# Altium PCB cs301_newrv2.PcbDoc
Units mil, origin at the board's own origin, x right, y up, seen from the top; angles counter-clockwise.
Board outline 10825 x 6635 mil, 2 copper layers (Top Layer, Bottom Layer); 118 components, 73 nets, 393 pads, 0 vias.
Unrouted connection lines stored in the file: 201.
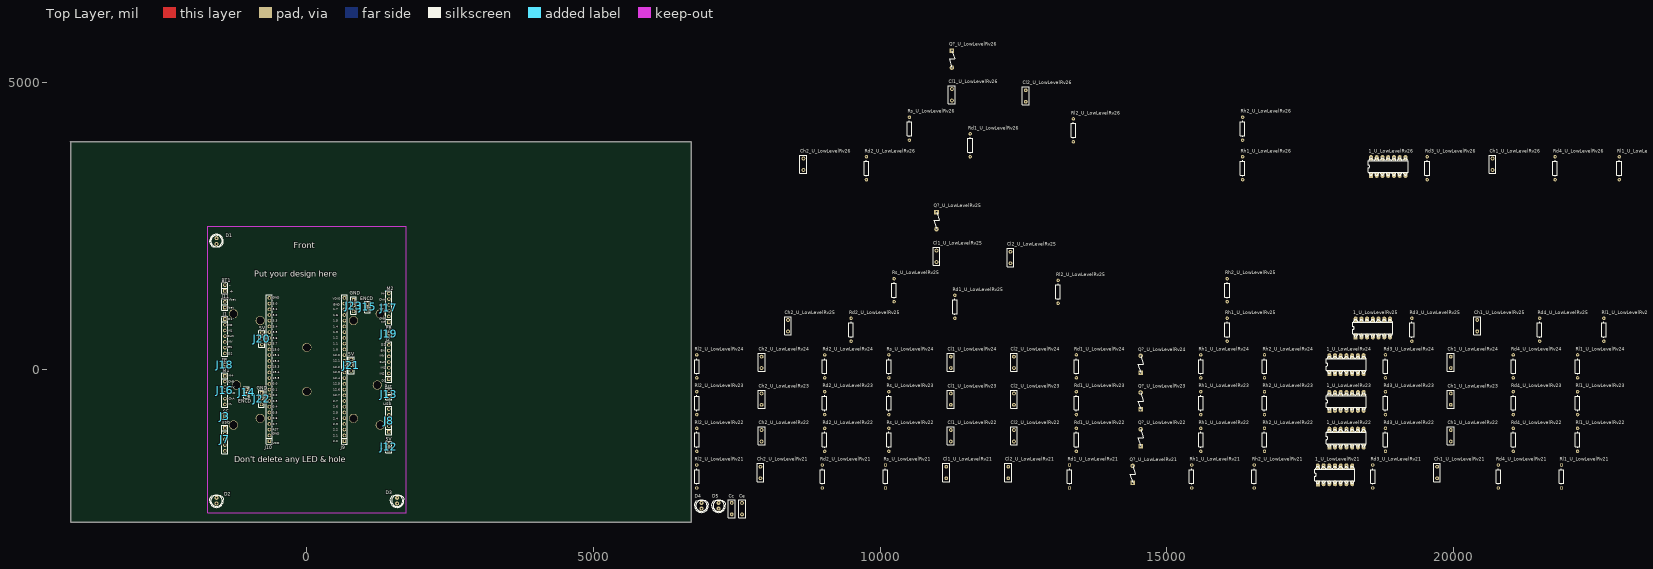
[diagram p0: Top Layer view]
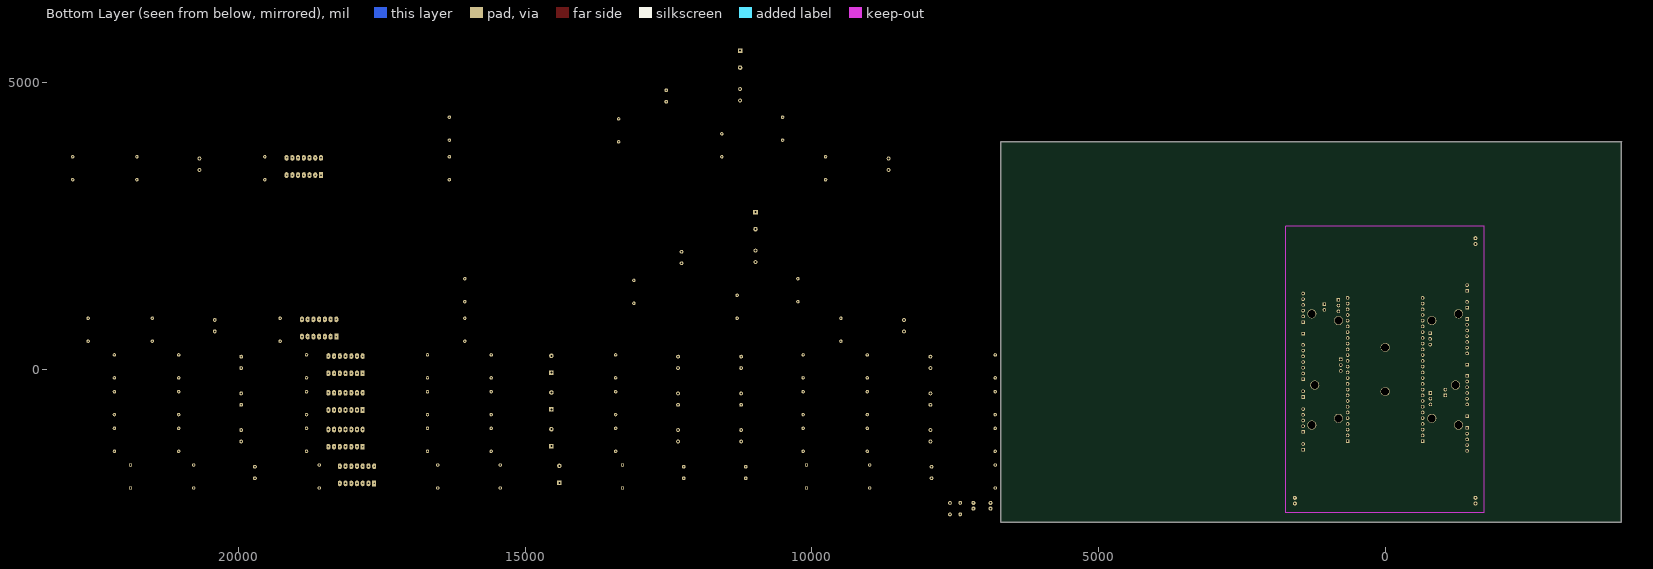
[diagram p1: Bottom Layer view, seen from below]

## Layer stack, top to bottom
Top Solder: solder mask 0.4, Solder Resist, Dk 3.5
Top Layer: signal copper 1.4
Dielectric1: dielectric 12.6, FR-4, Dk 4.8
Bottom Layer: signal copper 1.4
Bottom Solder: solder mask 0.4, Solder Resist, Dk 3.5

## Board outline
-4118.11,-2656.69 -4113.11,-2661.69 6701.89,-2661.69 6701.89,3973.31 -4123.11,3973.31 -4118.11,3968.31 -4118.11,-2656.69

## Design rules (kind name [scope] priority, off if disabled: settings)
Clearance [All] p1: gap=10 ignorepadtopadclearanceinfootprint=FALSE except(0: Arc-Hole Track-Hole SMDPad-Hole THPad-Hole Via-Hole Fill-Hole Poly-Hole Region-Hole Text-Hole)
PolygonConnect [All] p1: connectstyle=Relief reliefconductorwidth=20 reliefentries=4 polygonreliefangle="90 Angle" airgapwidth=10
RoomDefinition U_LowLevelRv26 [InComponentClass('U_LowLevelRv26')] p1: confinementstyle=ConfineIn formatcopy=TRUE lockcomponents=FALSE outline 7020,3270 23910,3270 23910,5930 7020,5930
RoomDefinition U_LowLevelRv25 [InComponentClass('U_LowLevelRv25')] p2: confinementstyle=ConfineIn formatcopy=TRUE lockcomponents=FALSE outline 6751.89,453.31 23641.89,453.31 23641.89,3113.31 6751.89,3113.31
RoomDefinition U_LowLevelRv24 [InComponentClass('U_LowLevelRv24')] p3: confinementstyle=ConfineIn formatcopy=TRUE lockcomponents=FALSE outline 6751.89,-186.69 23181.89,-186.69 23181.89,403.31 6751.89,403.31
RoomDefinition U_LowLevelRv23 [InComponentClass('U_LowLevelRv23')] p4: confinementstyle=ConfineIn formatcopy=TRUE lockcomponents=FALSE outline 6751.89,-826.69 23181.89,-826.69 23181.89,-236.69 6751.89,-236.69
RoomDefinition U_LowLevelRv22 [InComponentClass('U_LowLevelRv22')] p5: confinementstyle=ConfineIn formatcopy=TRUE lockcomponents=FALSE outline 6751.89,-1466.69 23181.89,-1466.69 23181.89,-876.69 6751.89,-876.69
RoomDefinition U_LowLevelRv21 [InComponentClass('U_LowLevelRv21')] p6: confinementstyle=ConfineIn formatcopy=TRUE lockcomponents=FALSE outline 6751.89,-2106.69 22881.89,-2106.69 22881.89,-1516.69 6751.89,-1516.69
RoomDefinition cs301_YourGroupNumber3 [InComponentClass('cs301_YourGroupNumber3')] p7: confinementstyle=ConfineIn formatcopy=TRUE lockcomponents=FALSE outline 6751.89,-2596.69 7661.89,-2596.69 7661.89,-2156.69 6751.89,-2156.69
RoutingVias [All] p1: holewidth=28 width=50 viastyle="Through Hole" minholewidth=28 minwidth=50 maxholewidth=28 maxwidth=50
SilkToSolderMaskClearance SilkscreenOverComponentPads [IsPad] p1: minsilkscreentomaskgap=10 clearancetoexposedcopper=TRUE
SolderMaskExpansion [All] p1: expansion=4
Width [All] p1: maxlimit=30 minlimit=10 preferedwidth=10 minimp=50.000000 maximp=50.000000 favimp=50.000000
29 further rules are at their usual default settings.

## Classes and differential pairs
component class U_LowLevelRv21: 1_U_LowLevelRv21 Ch1_U_LowLevelRv21 Ch2_U_LowLevelRv21 Cl1_U_LowLevelRv21 Cl2_U_LowLevelRv21 Q?_U_LowLevelRv21 Rd1_U_LowLevelRv21 Rd2_U_LowLevelRv21 Rd3_U_LowLevelRv21 Rd4_U_LowLevelRv21 Rh1_U_LowLevelRv21 Rh2_U_LowLevelRv21 Rl1_U_LowLevelRv21 Rl2_U_LowLevelRv21 Rs_U_LowLevelRv21
component class U_LowLevelRv22: 1_U_LowLevelRv22 Ch1_U_LowLevelRv22 Ch2_U_LowLevelRv22 Cl1_U_LowLevelRv22 Cl2_U_LowLevelRv22 Q?_U_LowLevelRv22 Rd1_U_LowLevelRv22 Rd2_U_LowLevelRv22 Rd3_U_LowLevelRv22 Rd4_U_LowLevelRv22 Rh1_U_LowLevelRv22 Rh2_U_LowLevelRv22 Rl1_U_LowLevelRv22 Rl2_U_LowLevelRv22 Rs_U_LowLevelRv22
component class U_LowLevelRv23: 1_U_LowLevelRv23 Ch1_U_LowLevelRv23 Ch2_U_LowLevelRv23 Cl1_U_LowLevelRv23 Cl2_U_LowLevelRv23 Q?_U_LowLevelRv23 Rd1_U_LowLevelRv23 Rd2_U_LowLevelRv23 Rd3_U_LowLevelRv23 Rd4_U_LowLevelRv23 Rh1_U_LowLevelRv23 Rh2_U_LowLevelRv23 Rl1_U_LowLevelRv23 Rl2_U_LowLevelRv23 Rs_U_LowLevelRv23
component class U_LowLevelRv24: 1_U_LowLevelRv24 Ch1_U_LowLevelRv24 Ch2_U_LowLevelRv24 Cl1_U_LowLevelRv24 Cl2_U_LowLevelRv24 Q?_U_LowLevelRv24 Rd1_U_LowLevelRv24 Rd2_U_LowLevelRv24 Rd3_U_LowLevelRv24 Rd4_U_LowLevelRv24 Rh1_U_LowLevelRv24 Rh2_U_LowLevelRv24 Rl1_U_LowLevelRv24 Rl2_U_LowLevelRv24 Rs_U_LowLevelRv24
component class U_LowLevelRv25: 1_U_LowLevelRv25 Ch1_U_LowLevelRv25 Ch2_U_LowLevelRv25 Cl1_U_LowLevelRv25 Cl2_U_LowLevelRv25 Q?_U_LowLevelRv25 Rd1_U_LowLevelRv25 Rd2_U_LowLevelRv25 Rd3_U_LowLevelRv25 Rd4_U_LowLevelRv25 Rh1_U_LowLevelRv25 Rh2_U_LowLevelRv25 Rl1_U_LowLevelRv25 Rl2_U_LowLevelRv25 Rs_U_LowLevelRv25
component class U_LowLevelRv26: 1_U_LowLevelRv26 Ch1_U_LowLevelRv26 Ch2_U_LowLevelRv26 Cl1_U_LowLevelRv26 Cl2_U_LowLevelRv26 Q?_U_LowLevelRv26 Rd1_U_LowLevelRv26 Rd2_U_LowLevelRv26 Rd3_U_LowLevelRv26 Rd4_U_LowLevelRv26 Rh1_U_LowLevelRv26 Rh2_U_LowLevelRv26 Rl1_U_LowLevelRv26 Rl2_U_LowLevelRv26 Rs_U_LowLevelRv26
net class ADC[5..0]: ADC0 ADC1 ADC2 ADC3 ADC4 ADC5
channel class LowLevelRv2: U_LowLevelRv21 U_LowLevelRv22 U_LowLevelRv23 U_LowLevelRv24 U_LowLevelRv25 U_LowLevelRv26

## Components (designator, comment, footprint, x,y, rotation, side; value= is the part's Value field where it differs from the comment)
1_U_LowLevelRv21 "LM324N" ECE-DIP14TH 17631.89,-1986.69 r90 top (schematic designator 1)
1_U_LowLevelRv22 "LM324N" ECE-DIP14TH 17831.89,-1346.69 r90 top (schematic designator 1)
1_U_LowLevelRv23 "LM324N" ECE-DIP14TH 17831.89,-706.69 r90 top (schematic designator 1)
1_U_LowLevelRv24 "LM324N" ECE-DIP14TH 17831.89,-66.69 r90 top (schematic designator 1)
1_U_LowLevelRv25 "LM324N" ECE-DIP14TH 18291.89,573.31 r90 top (schematic designator 1)
1_U_LowLevelRv26 "LM324N" ECE-DIP14TH 18560,3390 r90 top (schematic designator 1)
BT1 "Battery" SIP2 -1430,1370 r90 top locked
Cc "*" "FILM CAP-0.2" 7411.89,-2426.69 r90 top
Ce "*" "FILM CAP-0.2" 7591.89,-2426.69 r90 top
Ch1_U_LowLevelRv21 "" "FILM CAP-0.2" 19711.89,-1796.69 r90 top (schematic designator Ch1)
Ch1_U_LowLevelRv22 "" "FILM CAP-0.2" 19951.89,-1156.69 r90 top (schematic designator Ch1)
Ch1_U_LowLevelRv23 "" "FILM CAP-0.2" 19951.89,-516.69 r90 top (schematic designator Ch1)
Ch1_U_LowLevelRv24 "" "FILM CAP-0.2" 19951.89,123.31 r90 top (schematic designator Ch1)
Ch1_U_LowLevelRv25 "" "FILM CAP-0.2" 20411.89,763.31 r90 top (schematic designator Ch1)
Ch1_U_LowLevelRv26 "" "FILM CAP-0.2" 20680,3580 r90 top (schematic designator Ch1)
Ch2_U_LowLevelRv21 "" "FILM CAP-0.2" 7911.89,-1796.69 r90 top (schematic designator Ch2)
Ch2_U_LowLevelRv22 "" "FILM CAP-0.2" 7931.89,-1156.69 r90 top (schematic designator Ch2)
Ch2_U_LowLevelRv23 "" "FILM CAP-0.2" 7931.89,-516.69 r90 top (schematic designator Ch2)
Ch2_U_LowLevelRv24 "" "FILM CAP-0.2" 7931.89,123.31 r90 top (schematic designator Ch2)
Ch2_U_LowLevelRv25 "" "FILM CAP-0.2" 8391.89,763.31 r90 top (schematic designator Ch2)
Ch2_U_LowLevelRv26 "" "FILM CAP-0.2" 8660,3580 r90 top (schematic designator Ch2)
Cl1_U_LowLevelRv21 "" "FILM CAP-0.2" 11151.89,-1796.69 r90 top (schematic designator Cl1)
Cl1_U_LowLevelRv22 "" "FILM CAP-0.2" 11231.89,-1156.69 r90 top (schematic designator Cl1)
Cl1_U_LowLevelRv23 "" "FILM CAP-0.2" 11231.89,-516.69 r90 top (schematic designator Cl1)
Cl1_U_LowLevelRv24 "" "FILM CAP-0.2" 11231.89,123.31 r90 top (schematic designator Cl1)
Cl1_U_LowLevelRv25 "" "FILM CAP-0.2" 10981.89,1973.31 r270 top (schematic designator Cl1)
Cl1_U_LowLevelRv26 "" "FILM CAP-0.2" 11250,4790 r270 top (schematic designator Cl1)
Cl2_U_LowLevelRv21 "" "FILM CAP-0.2" 12231.89,-1796.69 r90 top (schematic designator Cl2)
Cl2_U_LowLevelRv22 "" "FILM CAP-0.2" 12331.89,-1156.69 r90 top (schematic designator Cl2)
Cl2_U_LowLevelRv23 "" "FILM CAP-0.2" 12331.89,-516.69 r90 top (schematic designator Cl2)
Cl2_U_LowLevelRv24 "" "FILM CAP-0.2" 12331.89,123.31 r90 top (schematic designator Cl2)
Cl2_U_LowLevelRv25 "" "FILM CAP-0.2" 12271.89,1953.31 r90 top (schematic designator Cl2)
Cl2_U_LowLevelRv26 "" "FILM CAP-0.2" 12540,4770 r90 top (schematic designator Cl2)
D1 "LED" LED0.1/5MM#1 -1574.8,2189.76 r180 top locked
D2 "LED" LED0.1/5MM#2 -1574.8,-2239.37 r0 top locked
D3 "LED" LED0.1/5MM#1 1574.8,-2239.37 r0 top locked
D4 "LED" LED0.1/5MM#1 6881.89,-2326.69 r0 top
D5 "LED" LED0.1/5MM#1 7181.89,-2326.69 r0 top
J1 "CON7" SIP7 -1430,880 r270 top locked
J2 "CON7" SIP7 1430,-170 r90 top locked
J3 "SF" SIP1/0.6 -1430,-815 r270 top locked
J7 "usb" SIP5 -1430,-1020 r270 top locked
J8 "usb" SIP5 1430,-1090 r90 top locked
J9 "26PIN" SIP26 655,-1250 r90 top locked
J10 "26PIN" SIP26 -655,-1250 r90 top locked
J11 "Battery" sip2 -1430,1080 r90 top locked
J12 "5V" sip2 1430,-1400 r90 top locked
J13 "Rst" sip2 1430,-480 r90 top locked
J14 "ENCD" sip2 -1050,-450 r90 top locked
J15 "ENCD" sip2 1060,1140 r270 top locked
J16 "M1" sip6 -1430,-110 r270 top locked
J17 "M2" sip6 1430,825 r90 top locked
J18 "FB" SIP1/0.6 -1430,85 r0 top locked
J19 "FB" SIP1/0.6 1430,625 r0 top locked
J20 "5V" sip3 -785,635 r270 top locked
J21 "5V" sip3 775,175 r270 top locked
J22 "GND" sip3 -790,-410 r270 top locked
J23 "GND" sip3 815,1215 r270 top locked
Q?_U_LowLevelRv21 "VEMT3700" VEMT3700 14551.89,-2076.69 r90 top (schematic designator Q?)
Q?_U_LowLevelRv22 "VEMT3700" VEMT3700 14691.89,-1436.69 r90 top (schematic designator Q?)
Q?_U_LowLevelRv23 "VEMT3700" VEMT3700 14691.89,-796.69 r90 top (schematic designator Q?)
Q?_U_LowLevelRv24 "VEMT3700" VEMT3700 14691.89,-156.69 r90 top (schematic designator Q?)
Q?_U_LowLevelRv25 "VEMT3700" VEMT3700 10831.89,2843.31 r270 top (schematic designator Q?)
Q?_U_LowLevelRv26 "VEMT3700" VEMT3700 11100,5660 r270 top (schematic designator Q?)
Rd1_U_LowLevelRv21 "" AXIAL-0.4 13301.89,-1866.69 r90 top (schematic designator Rd1)
Rd1_U_LowLevelRv22 "" AXIAL-0.4 13421.89,-1226.69 r90 top (schematic designator Rd1)
Rd1_U_LowLevelRv23 "" AXIAL-0.4 13421.89,-586.69 r90 top (schematic designator Rd1)
Rd1_U_LowLevelRv24 "" AXIAL-0.4 13421.89,53.31 r90 top (schematic designator Rd1)
Rd1_U_LowLevelRv25 "" AXIAL-0.4 11301.89,1093.31 r270 top (schematic designator Rd1)
Rd1_U_LowLevelRv26 "" AXIAL-0.4 11570,3910 r270 top (schematic designator Rd1)
Rd2_U_LowLevelRv21 "" AXIAL-0.4 8991.89,-1866.69 r90 top (schematic designator Rd2)
Rd2_U_LowLevelRv22 "" AXIAL-0.4 9031.89,-1226.69 r90 top (schematic designator Rd2)
Rd2_U_LowLevelRv23 "" AXIAL-0.4 9031.89,-586.69 r90 top (schematic designator Rd2)
Rd2_U_LowLevelRv24 "" AXIAL-0.4 9031.89,53.31 r90 top (schematic designator Rd2)
Rd2_U_LowLevelRv25 "" AXIAL-0.4 9491.89,693.31 r90 top (schematic designator Rd2)
Rd2_U_LowLevelRv26 "" AXIAL-0.4 9760,3510 r90 top (schematic designator Rd2)
Rd3_U_LowLevelRv21 "" AXIAL-0.4 18591.89,-1866.69 r90 top (schematic designator Rd3)
Rd3_U_LowLevelRv22 "" AXIAL-0.4 18811.89,-1226.69 r90 top (schematic designator Rd3)
Rd3_U_LowLevelRv23 "" AXIAL-0.4 18811.89,-586.69 r90 top (schematic designator Rd3)
Rd3_U_LowLevelRv24 "" AXIAL-0.4 18811.89,53.31 r90 top (schematic designator Rd3)
Rd3_U_LowLevelRv25 "" AXIAL-0.4 19271.89,693.31 r90 top (schematic designator Rd3)
Rd3_U_LowLevelRv26 "" AXIAL-0.4 19540,3510 r90 top (schematic designator Rd3)
Rd4_U_LowLevelRv21 "" AXIAL-0.4 20781.89,-1866.69 r90 top (schematic designator Rd4)
Rd4_U_LowLevelRv22 "" AXIAL-0.4 21041.89,-1226.69 r90 top (schematic designator Rd4)
Rd4_U_LowLevelRv23 "" AXIAL-0.4 21041.89,-586.69 r90 top (schematic designator Rd4)
Rd4_U_LowLevelRv24 "" AXIAL-0.4 21041.89,53.31 r90 top (schematic designator Rd4)
Rd4_U_LowLevelRv25 "" AXIAL-0.4 21501.89,693.31 r90 top (schematic designator Rd4)
Rd4_U_LowLevelRv26 "" AXIAL-0.4 21770,3510 r90 top (schematic designator Rd4)
Rh1_U_LowLevelRv21 "" AXIAL-0.4 15431.89,-1866.69 r90 top (schematic designator Rh1)
Rh1_U_LowLevelRv22 "" AXIAL-0.4 15591.89,-1226.69 r90 top (schematic designator Rh1)
Rh1_U_LowLevelRv23 "" AXIAL-0.4 15591.89,-586.69 r90 top (schematic designator Rh1)
Rh1_U_LowLevelRv24 "" AXIAL-0.4 15591.89,53.31 r90 top (schematic designator Rh1)
Rh1_U_LowLevelRv25 "" AXIAL-0.4 16051.89,693.31 r90 top (schematic designator Rh1)
Rh1_U_LowLevelRv26 "" AXIAL-0.4 16320,3510 r90 top (schematic designator Rh1)
Rh2_U_LowLevelRv21 "" AXIAL-0.4 16521.89,-1866.69 r90 top (schematic designator Rh2)
Rh2_U_LowLevelRv22 "" AXIAL-0.4 16701.89,-1226.69 r90 top (schematic designator Rh2)
Rh2_U_LowLevelRv23 "" AXIAL-0.4 16701.89,-586.69 r90 top (schematic designator Rh2)
Rh2_U_LowLevelRv24 "" AXIAL-0.4 16701.89,53.31 r90 top (schematic designator Rh2)
Rh2_U_LowLevelRv25 "" AXIAL-0.4 16051.89,1383.31 r90 top (schematic designator Rh2)
Rh2_U_LowLevelRv26 "" AXIAL-0.4 16320,4200 r90 top (schematic designator Rh2)
Rl1_U_LowLevelRv21 "" AXIAL-0.4 21881.89,-1866.69 r90 top (schematic designator Rl1)
Rl1_U_LowLevelRv22 "" AXIAL-0.4 22161.89,-1226.69 r90 top (schematic designator Rl1)
Rl1_U_LowLevelRv23 "" AXIAL-0.4 22161.89,-586.69 r90 top (schematic designator Rl1)
Rl1_U_LowLevelRv24 "" AXIAL-0.4 22161.89,53.31 r90 top (schematic designator Rl1)
Rl1_U_LowLevelRv25 "" AXIAL-0.4 22621.89,693.31 r90 top (schematic designator Rl1)
Rl1_U_LowLevelRv26 "" AXIAL-0.4 22890,3510 r90 top (schematic designator Rl1)
Rl2_U_LowLevelRv21 "" AXIAL-0.4 6801.89,-1866.69 r90 top (schematic designator Rl2)
Rl2_U_LowLevelRv22 "" AXIAL-0.4 6801.89,-1226.69 r90 top (schematic designator Rl2)
Rl2_U_LowLevelRv23 "" AXIAL-0.4 6801.89,-586.69 r90 top (schematic designator Rl2)
Rl2_U_LowLevelRv24 "" AXIAL-0.4 6801.89,53.31 r90 top (schematic designator Rl2)
Rl2_U_LowLevelRv25 "" AXIAL-0.4 13101.89,1353.31 r270 top (schematic designator Rl2)
Rl2_U_LowLevelRv26 "" AXIAL-0.4 13370,4170 r270 top (schematic designator Rl2)
Rs_U_LowLevelRv21 "" AXIAL-0.4 10091.89,-1866.69 r90 top (schematic designator Rs)
Rs_U_LowLevelRv22 "" AXIAL-0.4 10151.89,-1226.69 r90 top (schematic designator Rs)
Rs_U_LowLevelRv23 "" AXIAL-0.4 10151.89,-586.69 r90 top (schematic designator Rs)
Rs_U_LowLevelRv24 "" AXIAL-0.4 10151.89,53.31 r90 top (schematic designator Rs)
Rs_U_LowLevelRv25 "" AXIAL-0.4 10241.89,1383.31 r90 top (schematic designator Rs)
Rs_U_LowLevelRv26 "" AXIAL-0.4 10510,4200 r90 top (schematic designator Rs)

## Footprints (in the part's own frame and the unit in brackets; to place one, negate y for a bottom-side part, rotate by r counter-clockwise, add the part's x,y. Pads: shape width x height; smd on the part's side, far side on the other; paste and mask are expansions set on the pad)
AXIAL-0.4 [mil]
  round 60 hole 27.56: 1(-200,0) 2(200,0)
  silkscreen extent -138,-40 138,40, body extent -120,-40 120,40, height 81
ECE-DIP14TH [mil] "14 pin Dual in line"
  rect 100x70 hole 28: 1(0,0)
  oval 100x70 hole 28: 2(0,-100) 3(0,-200) 4(0,-300) 5(0,-400) 6(0,-500) 7(0,-600) 8(300,-600) 9(300,-500) 10(300,-400) 11(300,-300) 12(300,-200) 13(300,-100) 14(300,0)
  silkscreen extent 0,-646 300,50
"FILM CAP-0.2" [mm]
  round 1.7 hole 0.8: 1(-2.54,0) 2(2.54,0)
  silkscreen extent -4,-1.5 4,1.5, body extent -3.81,-1.27 3.81,1.27, height 7
LED0.1/5MM#1 [mil]
  round 70 hole 30: A(0,0) K(0,-100)
  silkscreen extent -118,-168 118,50
LED0.1/5MM#2 [mil]
  round 70 hole 30: A(0,0) K(0,-98.43)
  silkscreen extent -118,-168 118,50
SIP1/0.6 [mil]
  rect 62x62 hole 35.43: 1(0,0)
  silkscreen extent -50,-50 50,50
SIP2 [mil]
  rect 62x62 hole 35.43: 1(0,0)
  round 62 hole 35.43: 2(100,0)
  silkscreen extent -50,-50 150,50
sip2 [mil]
  rect 62x62 hole 35.43: 1(0,0)
  round 62 hole 35.43: 2(100,0)
  silkscreen extent -50,-50 150,50
sip3 [mil]
  rect 62x62 hole 35.43: 1(0,0)
  round 62 hole 35.43: 2(100,0) 3(200,0)
  silkscreen extent -50,-50 250,50
SIP5 [mil]
  rect 62x62 hole 35.43: 1(0,0)
  round 62 hole 35.43: 2(100,0) 3(200,0) 4(300,0) 5(400,0)
  silkscreen extent -50,-50 450,50
sip6 [mil]
  rect 62x62 hole 35.43: 1(0,0)
  round 62 hole 35.43: 2(100,0) 3(200,0) 4(300,0) 5(400,0) 6(500,0)
  silkscreen extent -50,-50 550,50
SIP7 [mil]
  rect 62x62 hole 35.43: 1(0,0)
  round 62 hole 35.43: 2(100,0) 3(200,0) 4(300,0) 5(400,0) 6(500,0) 7(600,0)
  silkscreen extent -50,-50 650,50
SIP26 [mil]
  rect 62x62 hole 35.43: 1(0,0)
  round 62 hole 35.43: 2(100,0) 3(200,0) 4(300,0) 5(400,0) 6(500,0) 7(600,0) 8(700,0) 9(800,0) 10(900,0) 11(1000,0) 12(1100,0) 13(1200,0) 14(1300,0) 15(1400,0) 16(1500,0) 17(1600,0) 18(1700,0) 19(1800,0) 20(1900,0) 21(2000,0) 22(2100,0) 23(2200,0) 24(2300,0) 25(2400,0) 26(2500,0)
  silkscreen extent -50,-50 2550,50
VEMT3700 [mm]
  rect 2x2 hole 0.9: 1(2.54,3.81)
  round 2 hole 0.9: 2(10.033,3.81)
  silkscreen extent 2.54,2.54 10.03,5.08

## Part data
1_U_LowLevelRv21 1_U_LowLevelRv22 1_U_LowLevelRv23 1_U_LowLevelRv24 1_U_LowLevelRv25 1_U_LowLevelRv26: library part OPA000002, "IC OPAMP LM324 QUAD TH", Manufactuer="Texas instruments", Size/Package=DIP14, Assembly Method="Through hole", Category=OpAmp, Datasheet Link=http://share.engineering.auckland.ac.nz/ece/ts/Student%20Documents/LM324.pdf, Item Type=Item, Manufacturer-PN=LM324N, Path="ece/ts/Lists/Stock Inventory", Status=Active, Supplier1=Digikey, Supplier1-PN=296-1391-5-ND, Supplier2="Active Components", Supplier2-PN=LM324N, UoA Stock#=OPA000002
BT1 J11 J12 J13 J14 J15: library part CON2, "Connector"
Cc Ce Ch1_U_LowLevelRv21 Ch1_U_LowLevelRv22 Ch1_U_LowLevelRv23 Ch1_U_LowLevelRv24 Ch1_U_LowLevelRv25 Ch1_U_LowLevelRv26 Ch2_U_LowLevelRv21 Ch2_U_LowLevelRv22 Ch2_U_LowLevelRv23 Ch2_U_LowLevelRv24 Ch2_U_LowLevelRv25 Ch2_U_LowLevelRv26 Cl1_U_LowLevelRv21 Cl1_U_LowLevelRv22 Cl1_U_LowLevelRv23 Cl1_U_LowLevelRv24 Cl1_U_LowLevelRv25 Cl1_U_LowLevelRv26 Cl2_U_LowLevelRv21 Cl2_U_LowLevelRv22 Cl2_U_LowLevelRv23 Cl2_U_LowLevelRv24 Cl2_U_LowLevelRv25 Cl2_U_LowLevelRv26: library part CAP, "Capacitor Non Polarised Through Hole"
J1 J2: "Connector"
J3 J18 J19: library part CON1, "Connector"
J7 J8: library part CON5, "Connector"
J16 J17: library part CON6, "Connector"
J20 J21 J22 J23: library part CON3, "Connector"
Q?_U_LowLevelRv21 Q?_U_LowLevelRv22 Q?_U_LowLevelRv23 Q?_U_LowLevelRv24 Q?_U_LowLevelRv25 Q?_U_LowLevelRv26: "Silicon NPN Phototransistor"
Rd1_U_LowLevelRv21 Rd1_U_LowLevelRv22 Rd1_U_LowLevelRv23 Rd1_U_LowLevelRv24 Rd1_U_LowLevelRv25 Rd1_U_LowLevelRv26 Rd2_U_LowLevelRv21 Rd2_U_LowLevelRv22 Rd2_U_LowLevelRv23 Rd2_U_LowLevelRv24 Rd2_U_LowLevelRv25 Rd2_U_LowLevelRv26 Rd3_U_LowLevelRv21 Rd3_U_LowLevelRv22 Rd3_U_LowLevelRv23 Rd3_U_LowLevelRv24 Rd3_U_LowLevelRv25 Rd3_U_LowLevelRv26 Rd4_U_LowLevelRv21 Rd4_U_LowLevelRv22 Rd4_U_LowLevelRv23 Rd4_U_LowLevelRv24 Rd4_U_LowLevelRv25 Rd4_U_LowLevelRv26 Rh1_U_LowLevelRv21 Rh1_U_LowLevelRv22 Rh1_U_LowLevelRv23 Rh1_U_LowLevelRv24 Rh1_U_LowLevelRv25 Rh1_U_LowLevelRv26 Rh2_U_LowLevelRv21 Rh2_U_LowLevelRv22 Rh2_U_LowLevelRv23 Rh2_U_LowLevelRv24 Rh2_U_LowLevelRv25 Rh2_U_LowLevelRv26 Rl1_U_LowLevelRv21 Rl1_U_LowLevelRv22 Rl1_U_LowLevelRv23 Rl1_U_LowLevelRv24 Rl1_U_LowLevelRv25 Rl1_U_LowLevelRv26 Rl2_U_LowLevelRv21 Rl2_U_LowLevelRv22 Rl2_U_LowLevelRv23 Rl2_U_LowLevelRv24 Rl2_U_LowLevelRv25 Rl2_U_LowLevelRv26 Rs_U_LowLevelRv21 Rs_U_LowLevelRv22 Rs_U_LowLevelRv23 Rs_U_LowLevelRv24 Rs_U_LowLevelRv25 Rs_U_LowLevelRv26: library part Res, "Through Hole Resistor", ComponentLink1Description=http://www.royalohm.com/pdf/product2017/PrecisionMetalMF.pdf, LatestRevisionDate=17-Jul-2002, LatestRevisionNote="Re-released for DXP Platform.", PackageReference=AXIAL-0.4, Published=8-Jun-2000, Publisher="Altium Limited"

## Free pads (board coordinates)
  round 157.48 hole 137.8 unplated: 0(-1280,-970) 0(-1280,970) 0(-1228,-272) 0(0,-385) 0(0,385) 0(1228,-272) 0(1280,-970) 0(1280,970) 1(-813,-853) 1(-813,853) 1(813,-853) 1(813,853)

## Nets (pads, with @x,y where several pads share a name; then routed paths per layer and width w, separated by ;. In a path a pad name is that pad's centre, name@x,y a point inside that pad or via, vN(x,y) a via of type N, cw(c..) or ccw(c..) an arc to the next point about the centre after c; other vN are vias at no path point)
5V: 1_U_LowLevelRv21.4 1_U_LowLevelRv22.4 1_U_LowLevelRv23.4 1_U_LowLevelRv24.4 1_U_LowLevelRv25.4 1_U_LowLevelRv26.4 Cc.1 Ce.1 J12.1 J20.1 J20.2 J20.3 J21.1 J21.2 J21.3 Q?_U_LowLevelRv21.1 Q?_U_LowLevelRv22.1 Q?_U_LowLevelRv23.1 Q?_U_LowLevelRv24.1 Q?_U_LowLevelRv25.1 Q?_U_LowLevelRv26.1
ADC0: J10.3
ADC1: J10.4
ADC2: J10.5
ADC3: J9.24
ADC4: J9.23
ADC5: J9.22
ADC_wire1: 1_U_LowLevelRv21.8 1_U_LowLevelRv21.9 Ch2_U_LowLevelRv21.1
ADC_wire2: 1_U_LowLevelRv22.8 1_U_LowLevelRv22.9 Ch2_U_LowLevelRv22.1
ADC_wire3: 1_U_LowLevelRv23.8 1_U_LowLevelRv23.9 Ch2_U_LowLevelRv23.1
ADC_wire4: 1_U_LowLevelRv24.8 1_U_LowLevelRv24.9 Ch2_U_LowLevelRv24.1
ADC_wire5: 1_U_LowLevelRv25.8 1_U_LowLevelRv25.9 Ch2_U_LowLevelRv25.1
ADC_wire6: 1_U_LowLevelRv26.8 1_U_LowLevelRv26.9 Ch2_U_LowLevelRv26.1
CommonGND_U_LowLevelRv21: 1_U_LowLevelRv21.11 1_U_LowLevelRv22.11 1_U_LowLevelRv23.11 1_U_LowLevelRv24.11 1_U_LowLevelRv25.11 1_U_LowLevelRv26.11 Cc.2 Ce.2 Ch1_U_LowLevelRv21.1 Ch1_U_LowLevelRv22.1 Ch1_U_LowLevelRv23.1 Ch1_U_LowLevelRv24.1 Ch1_U_LowLevelRv25.1 Ch1_U_LowLevelRv26.1 D1.K D2.K D3.K D4.K D5.K J12.2 J22.1 J22.2 J22.3 J23.1 J23.2 J23.3 Rd2_U_LowLevelRv21.1 Rd2_U_LowLevelRv22.1 Rd2_U_LowLevelRv23.1 Rd2_U_LowLevelRv24.1 Rd2_U_LowLevelRv25.1 Rd2_U_LowLevelRv26.1 Rd3_U_LowLevelRv21.2 Rd3_U_LowLevelRv22.2 Rd3_U_LowLevelRv23.2 Rd3_U_LowLevelRv24.2 Rd3_U_LowLevelRv25.2 Rd3_U_LowLevelRv26.2 Rl1_U_LowLevelRv21.1 Rl1_U_LowLevelRv22.1 Rl1_U_LowLevelRv23.1 Rl1_U_LowLevelRv24.1 Rl1_U_LowLevelRv25.1 Rl1_U_LowLevelRv26.1 Rs_U_LowLevelRv21.1 Rs_U_LowLevelRv22.1 Rs_U_LowLevelRv23.1 Rs_U_LowLevelRv24.1 Rs_U_LowLevelRv25.1 Rs_U_LowLevelRv26.1
Led1: D1.A J10.25
Led2: D2.A J10.24
Led3: D3.A J10.15
Led4: D4.A J9.19 J10.14
Led5: D5.A J9.18
Net1_U_LowLevelRv21_1: 1_U_LowLevelRv21.1 1_U_LowLevelRv21.2 Rd1_U_LowLevelRv21.1 Rl2_U_LowLevelRv21.2
Net1_U_LowLevelRv21_3: 1_U_LowLevelRv21.3 Cl2_U_LowLevelRv21.2 Rl1_U_LowLevelRv21.2
Net1_U_LowLevelRv21_5: 1_U_LowLevelRv21.5 Rd1_U_LowLevelRv21.2 Rd2_U_LowLevelRv21.2
Net1_U_LowLevelRv21_6: 1_U_LowLevelRv21.6 Rd3_U_LowLevelRv21.1 Rd4_U_LowLevelRv21.1
Net1_U_LowLevelRv21_7: 1_U_LowLevelRv21.7 Rd4_U_LowLevelRv21.2 Rh1_U_LowLevelRv21.1
Net1_U_LowLevelRv21_10: 1_U_LowLevelRv21.10 Ch1_U_LowLevelRv21.2 Rh2_U_LowLevelRv21.2
Net1_U_LowLevelRv22_1: 1_U_LowLevelRv22.1 1_U_LowLevelRv22.2 Rd1_U_LowLevelRv22.1 Rl2_U_LowLevelRv22.2
Net1_U_LowLevelRv22_3: 1_U_LowLevelRv22.3 Cl2_U_LowLevelRv22.2 Rl1_U_LowLevelRv22.2
Net1_U_LowLevelRv22_5: 1_U_LowLevelRv22.5 Rd1_U_LowLevelRv22.2 Rd2_U_LowLevelRv22.2
Net1_U_LowLevelRv22_6: 1_U_LowLevelRv22.6 Rd3_U_LowLevelRv22.1 Rd4_U_LowLevelRv22.1
Net1_U_LowLevelRv22_7: 1_U_LowLevelRv22.7 Rd4_U_LowLevelRv22.2 Rh1_U_LowLevelRv22.1
Net1_U_LowLevelRv22_10: 1_U_LowLevelRv22.10 Ch1_U_LowLevelRv22.2 Rh2_U_LowLevelRv22.2
Net1_U_LowLevelRv23_1: 1_U_LowLevelRv23.1 1_U_LowLevelRv23.2 Rd1_U_LowLevelRv23.1 Rl2_U_LowLevelRv23.2
Net1_U_LowLevelRv23_3: 1_U_LowLevelRv23.3 Cl2_U_LowLevelRv23.2 Rl1_U_LowLevelRv23.2
Net1_U_LowLevelRv23_5: 1_U_LowLevelRv23.5 Rd1_U_LowLevelRv23.2 Rd2_U_LowLevelRv23.2
Net1_U_LowLevelRv23_6: 1_U_LowLevelRv23.6 Rd3_U_LowLevelRv23.1 Rd4_U_LowLevelRv23.1
Net1_U_LowLevelRv23_7: 1_U_LowLevelRv23.7 Rd4_U_LowLevelRv23.2 Rh1_U_LowLevelRv23.1
Net1_U_LowLevelRv23_10: 1_U_LowLevelRv23.10 Ch1_U_LowLevelRv23.2 Rh2_U_LowLevelRv23.2
Net1_U_LowLevelRv24_1: 1_U_LowLevelRv24.1 1_U_LowLevelRv24.2 Rd1_U_LowLevelRv24.1 Rl2_U_LowLevelRv24.2
Net1_U_LowLevelRv24_3: 1_U_LowLevelRv24.3 Cl2_U_LowLevelRv24.2 Rl1_U_LowLevelRv24.2
Net1_U_LowLevelRv24_5: 1_U_LowLevelRv24.5 Rd1_U_LowLevelRv24.2 Rd2_U_LowLevelRv24.2
Net1_U_LowLevelRv24_6: 1_U_LowLevelRv24.6 Rd3_U_LowLevelRv24.1 Rd4_U_LowLevelRv24.1
Net1_U_LowLevelRv24_7: 1_U_LowLevelRv24.7 Rd4_U_LowLevelRv24.2 Rh1_U_LowLevelRv24.1
Net1_U_LowLevelRv24_10: 1_U_LowLevelRv24.10 Ch1_U_LowLevelRv24.2 Rh2_U_LowLevelRv24.2
Net1_U_LowLevelRv25_1: 1_U_LowLevelRv25.1 1_U_LowLevelRv25.2 Rd1_U_LowLevelRv25.1 Rl2_U_LowLevelRv25.2
Net1_U_LowLevelRv25_3: 1_U_LowLevelRv25.3 Cl2_U_LowLevelRv25.2 Rl1_U_LowLevelRv25.2
Net1_U_LowLevelRv25_5: 1_U_LowLevelRv25.5 Rd1_U_LowLevelRv25.2 Rd2_U_LowLevelRv25.2
Net1_U_LowLevelRv25_6: 1_U_LowLevelRv25.6 Rd3_U_LowLevelRv25.1 Rd4_U_LowLevelRv25.1
Net1_U_LowLevelRv25_7: 1_U_LowLevelRv25.7 Rd4_U_LowLevelRv25.2 Rh1_U_LowLevelRv25.1
Net1_U_LowLevelRv25_10: 1_U_LowLevelRv25.10 Ch1_U_LowLevelRv25.2 Rh2_U_LowLevelRv25.2
Net1_U_LowLevelRv26_1: 1_U_LowLevelRv26.1 1_U_LowLevelRv26.2 Rd1_U_LowLevelRv26.1 Rl2_U_LowLevelRv26.2
Net1_U_LowLevelRv26_3: 1_U_LowLevelRv26.3 Cl2_U_LowLevelRv26.2 Rl1_U_LowLevelRv26.2
Net1_U_LowLevelRv26_5: 1_U_LowLevelRv26.5 Rd1_U_LowLevelRv26.2 Rd2_U_LowLevelRv26.2
Net1_U_LowLevelRv26_6: 1_U_LowLevelRv26.6 Rd3_U_LowLevelRv26.1 Rd4_U_LowLevelRv26.1
Net1_U_LowLevelRv26_7: 1_U_LowLevelRv26.7 Rd4_U_LowLevelRv26.2 Rh1_U_LowLevelRv26.1
Net1_U_LowLevelRv26_10: 1_U_LowLevelRv26.10 Ch1_U_LowLevelRv26.2 Rh2_U_LowLevelRv26.2
NetCh2_U_LowLevelRv21_2: Ch2_U_LowLevelRv21.2 Rh1_U_LowLevelRv21.2 Rh2_U_LowLevelRv21.1
NetCh2_U_LowLevelRv22_2: Ch2_U_LowLevelRv22.2 Rh1_U_LowLevelRv22.2 Rh2_U_LowLevelRv22.1
NetCh2_U_LowLevelRv23_2: Ch2_U_LowLevelRv23.2 Rh1_U_LowLevelRv23.2 Rh2_U_LowLevelRv23.1
NetCh2_U_LowLevelRv24_2: Ch2_U_LowLevelRv24.2 Rh1_U_LowLevelRv24.2 Rh2_U_LowLevelRv24.1
NetCh2_U_LowLevelRv25_2: Ch2_U_LowLevelRv25.2 Rh1_U_LowLevelRv25.2 Rh2_U_LowLevelRv25.1
NetCh2_U_LowLevelRv26_2: Ch2_U_LowLevelRv26.2 Rh1_U_LowLevelRv26.2 Rh2_U_LowLevelRv26.1
NetCl1_U_LowLevelRv21_1: Cl1_U_LowLevelRv21.1 Q?_U_LowLevelRv21.2 Rs_U_LowLevelRv21.2
NetCl1_U_LowLevelRv21_2: Cl1_U_LowLevelRv21.2 Cl2_U_LowLevelRv21.1 Rl2_U_LowLevelRv21.1
NetCl1_U_LowLevelRv22_1: Cl1_U_LowLevelRv22.1 Q?_U_LowLevelRv22.2 Rs_U_LowLevelRv22.2
NetCl1_U_LowLevelRv22_2: Cl1_U_LowLevelRv22.2 Cl2_U_LowLevelRv22.1 Rl2_U_LowLevelRv22.1
NetCl1_U_LowLevelRv23_1: Cl1_U_LowLevelRv23.1 Q?_U_LowLevelRv23.2 Rs_U_LowLevelRv23.2
NetCl1_U_LowLevelRv23_2: Cl1_U_LowLevelRv23.2 Cl2_U_LowLevelRv23.1 Rl2_U_LowLevelRv23.1
NetCl1_U_LowLevelRv24_1: Cl1_U_LowLevelRv24.1 Q?_U_LowLevelRv24.2 Rs_U_LowLevelRv24.2
NetCl1_U_LowLevelRv24_2: Cl1_U_LowLevelRv24.2 Cl2_U_LowLevelRv24.1 Rl2_U_LowLevelRv24.1
NetCl1_U_LowLevelRv25_1: Cl1_U_LowLevelRv25.1 Q?_U_LowLevelRv25.2 Rs_U_LowLevelRv25.2
NetCl1_U_LowLevelRv25_2: Cl1_U_LowLevelRv25.2 Cl2_U_LowLevelRv25.1 Rl2_U_LowLevelRv25.1
NetCl1_U_LowLevelRv26_1: Cl1_U_LowLevelRv26.1 Q?_U_LowLevelRv26.2 Rs_U_LowLevelRv26.2
NetCl1_U_LowLevelRv26_2: Cl1_U_LowLevelRv26.2 Cl2_U_LowLevelRv26.1 Rl2_U_LowLevelRv26.1
pads on no net: 1_U_LowLevelRv21.12 1_U_LowLevelRv21.13 1_U_LowLevelRv21.14 1_U_LowLevelRv22.12 1_U_LowLevelRv22.13 1_U_LowLevelRv22.14 1_U_LowLevelRv23.12 1_U_LowLevelRv23.13 1_U_LowLevelRv23.14 1_U_LowLevelRv24.12 1_U_LowLevelRv24.13 1_U_LowLevelRv24.14 1_U_LowLevelRv25.12 1_U_LowLevelRv25.13 1_U_LowLevelRv25.14 1_U_LowLevelRv26.12 1_U_LowLevelRv26.13 1_U_LowLevelRv26.14 BT1.1 BT1.2 J1.1 J1.2 J1.3 J1.4 J1.5 J1.6 J1.7 J2.1 J2.2 J2.3 J2.4 J2.5 J2.6 J2.7 J3.1 J7.1 J7.2 J7.3 J7.4 J7.5 J8.1 J8.2 J8.3 J8.4 J8.5 J9.1 J9.2 J9.3 J9.4 J9.5 J9.6 J9.7 J9.8 J9.9 J9.10 J9.11 J9.12 J9.13 J9.14 J9.15 J9.16 J9.17 J9.20 J9.21 J9.25 J9.26 J10.1 J10.2 J10.6 J10.7 J10.8 J10.9 J10.10 J10.11 J10.12 J10.13 J10.16 J10.17 J10.18 J10.19 J10.20 J10.21 J10.22 J10.23 J10.26 J11.1 J11.2 J13.1 J13.2 J14.1 J14.2 J15.1 J15.2 J16.1 J16.2 J16.3 J16.4 J16.5 J16.6 J17.1 J17.2 J17.3 J17.4 J17.5 J17.6 J18.1 J19.1

## Keep-outs
Keep-Out Layer:
  lines w10: -1730,-2500 1730,-2500 1730,2500 -1730,2500 -1730,-2500

## Silkscreen, mask and mechanical layers (free items; w line width, h text height)
Top Overlay:
  text "Front" at -228.11,2113.31 h100
  text "Put your design here" at -920,1620 h100
  text "-" at -1350,1430 h60
  text "+" at -1345,1335 h60
  text "M-" at 1295,1305 h40
  text "GND" at -590,1230 h40
  text "VDIO" at 455,1220 h40
  text "ChA" at 1265,1200 h40
  text "Vbat" at -1360,1195 h40
  text "3.0" at -590,1130 h40
  text "GND" at 460,1110 h40
  text "GND" at 1260,1100 h40
  text "Ibat" at -1375,1055 h40
  text "+5V" at 1260,1035 h40
  text "3.1" at -590,1030 h40
  text "1.7" at 465,1030 h40
  text "3.2" at -590,930 h40
  text "1.6" at 465,930 h40
  text "ChB" at 1265,870 h40
  text "D1" at -1370,855 h40
  text "1.5" at 465,835 h40
  text "3.3" at -590,830 h40
  text "M+" at 1300,805 h40
  text "IN2" at -1375,755 h40
  text "3.4" at -590,730 h40
  text "1.4" at 465,730 h40
  text "IN1" at -1375,655 h40
  text "3.5" at -590,630 h40
  text "1.3" at 465,630 h40
  text "SLW" at -1380,565 h40
  text "1.2" at 465,535 h40
  text "3.6" at -590,530 h40
  text "INV" at -1375,465 h40
  text "3.7" at -590,430 h40
  text "1.1" at 465,430 h40
  text "D2" at 1295,415 h40
  text "EN" at -1370,370 h40
  text "15.0" at -595,330 h40
  text "1.0" at 465,330 h40
  text "EN" at 1290,310 h40
  text "D2" at -1370,260 h40
  text "15.1" at -590,230 h40
  text "12.0" at 465,230 h40
  text "INV" at 1270,220 h40
  text "12.1" at 465,135 h40
  text "15.2" at -595,130 h40
  text "SLW" at 1270,105 h40
  text "15.3" at -595,30 h40
  text "12.2" at 465,25 h40
  text "IN1" at 1285,15 h40
  text "15.4" at -595,-70 h40
  text "12.3" at 465,-70 h40
  text "IN2" at 1270,-90 h40
  text "M+" at -1365,-130 h40
  text "15.5" at -595,-170 h40
  text "12.4" at 465,-170 h40
  text "D1" at 1305,-210 h40
  text "ChB" at -1370,-230 h40
  text "0.0" at -590,-270 h40
  text "12.5" at 465,-270 h40
  text "+5V" at -1370,-325 h40
  text "0.1" at -590,-370 h40
  text "12.6" at 465,-370 h40
  text "GND" at -1365,-430 h40
  text "0.2" at -590,-470 h40
  text "12.7" at 465,-470 h40
  text "ChA" at -1365,-530 h40
  text "0.3" at -590,-570 h40
  text "2.7" at 465,-570 h40
  text "M-" at -1365,-625 h40
  text "0.4" at -590,-670 h40
  text "2.6" at 465,-670 h40
  text "0.5" at -590,-770 h40
  text "2.5" at 465,-770 h40
  text "0.6" at -590,-870 h40
  text "2.4" at 465,-875 h40
  text "0.7" at -590,-970 h40
  text "2.3" at 465,-970 h40
  text "RST" at -590,-1070 h40
  text "2.2" at 465,-1070 h40
  text "GND" at -590,-1135 h40
  text "2.1" at 465,-1170 h40
  text "2.0" at 465,-1270 h40
  text "-" at 1320,-1280 h60 r180
  text "VDD" at -590,-1305 h40
  text "+" at 1330,-1415 h60 r90
  text "Don't delete any LED & hole" at -1270,-1620 h100